# EAGLE board easySens-RS485-RND_455-00307-V003 (EAGLE 8.5.1)

Size 65 x 33 mm. Coordinates in mm from the lower left corner, seen from the top.
Outline: 65,0 0,0 0,33 65,33 65,20.5 65,8.89 65,0
Copper layers (1*16): Top 0.035mm / dielectric 1.5mm / Bottom 0.035mm
Design rules "SeeedStudio_2layer_DRU_no_angle_20140221": minimum track width 6mil, minimum drill 12mil, track to track 6mil, track to pad 6mil, pad to pad 6mil, via to via 6mil, smd to smd 0mil, copper to edge 10mil, drill to drill 10mil, minimum pad ring 10mil, minimum via ring 6mil, stop-mask expansion 2mil, vias tented up to drill 100mil, thermal gap 10mil
Net classes: 0 default: width 0.254 mm; 1 PWR: width 0.406 mm
Holes 2 mm at 52.5,0.5 52.5,32.5 12.5,0.5 12.5,32.5
tRestrict: area 50.3,-1.7 to 54.7,2.7; area 50.3,30.3 to 54.7,34.7; area 10.3,30.3 to 14.7,34.7; area 10.3,-1.7 to 14.7,2.7; area 15.2,-1.3 to 50.8,0.6
bRestrict: area 10.3,-1.7 to 14.7,2.7; area 50.3,-1.7 to 54.7,2.7; area 50.3,30.3 to 54.7,34.7; area 10.3,30.3 to 14.7,34.7; area 15.2,-1.3 to 50.8,0.6

## Footprints (pad centres in the part's own frame; a part is rotated, then mirrored left to right if it is on the bottom)
1X01 = drill 1.016 octagon: 1 0,0
C0805 = smd 1.3 x 1.5: 1 -0.95,0; 2 0.95,0
C1210 = smd 1.6 x 2.7: 1 -1.4,0; 2 1.4,0
1812L = smd 2.03 x 3.3: P$1 -2.16,0; P$2 2.16,0
0603-1608X90N = smd 0.95 x 1: 1 -0.8,0; 2 0.8,0
SOT23 = smd 1.016 x 1.143: 1 -0.889,-1.016; 2 0.889,-1.016; 3 0,1.016
SOT223 = smd 1.499 x 2.007: 1 -2.261,-3.15; 2 0.025,-3.15; 3 2.311,-3.15 | smd 3.81 x 2.007: 4 0,3.15
SSOP28 = smd 0.381 x 2.032: 1 0,0; 2 0.65,0; 3 1.3,0; 4 1.95,0; 5 2.6,0; 6 3.25,0; 7 3.9,0; 8 4.55,0; 9 5.2,0; 10 5.85,0; 11 6.5,0; 12 7.15,0; 13 7.8,0; 14 8.45,0; 15 8.45,7.112; 16 7.8,7.112; 17 7.15,7.112; 18 6.5,7.112; 19 5.85,7.112; 20 5.2,7.112; 21 4.55,7.112; 22 3.9,7.112; 23 3.25,7.112; 24 2.6,7.112; 25 1.95,7.112; 26 1.3,7.112; 27 0.65,7.112; 28 0,7.112
RJ45_2X_NARROW_SHILDPINS = drill 0.889: 1-1 -11.43,6.35; 1-2 -10.16,8.89; 1-3 -8.89,6.35; 1-4 -7.62,8.89; 1-5 -6.35,6.35; 1-6 -5.08,8.89; 1-7 -3.81,6.35; 1-8 -2.54,8.89; 2-1 2.54,6.35; 2-2 3.81,8.89; 2-3 5.08,6.35; 2-4 6.35,8.89; 2-5 7.62,6.35; 2-6 8.89,8.89; 2-7 10.16,6.35; 2-8 11.43,8.89 | drill 1.575 pad 2.184: G1 -15,-3; G2 0,10.414; G3 15,-3 | hole 2.6: -12.7,0; 12.573,0
USB-MINI-B_2 = smd 0.508 x 2.54: 1 0,0; 2 0.8,0; 3 1.6,0; 4 2.4,0; 5 3.2,0 | smd 2.286 x 1.778: 6 -2.717,5.948; 7 -2.717,0.36; 8 5.918,0.36; 9 5.918,5.948 | hole 0.95: -0.6,2.9; 3.8,2.9
SMT-JUMPER_2_NC_PASTE_SILK = smd 0.635 x 1.27: 1 -0.406,0; 2 0.406,0
ARDUINO-PRO-MINI#NP = drill 1: J2.1 -1.27,5.08; J2.2 -3.81,5.08; J3.1 15.24,0; J3.2 15.24,2.54; J3.3 15.24,5.08; J6.1 -12.7,7.62; J6.2 -10.16,7.62; J6.3 -7.62,7.62; J6.4 -5.08,7.62; J6.5 -2.54,7.62; J6.6 0,7.62; J6.7 2.54,7.62; J6.8 5.08,7.62; J6.9 7.62,7.62; J6.10 10.16,7.62; J6.11 12.7,7.62; J6.12 15.24,7.62; J7.1 15.24,-7.62; J7.2 12.7,-7.62; J7.3 10.16,-7.62; J7.4 7.62,-7.62; J7.5 5.08,-7.62; J7.6 2.54,-7.62; J7.7 0,-7.62; J7.8 -2.54,-7.62; J7.9 -5.08,-7.62; J7.10 -7.62,-7.62; J7.11 -10.16,-7.62; J7.12 -12.7,-7.62
1X04 = drill 1.016 pad 1.88: 1 0,0; 2 2.54,0; 3 5.08,0; 4 7.62,0
M0805 = smd 1.3 x 1.6: 1 -0.95,0; 2 0.95,0
R0805 = smd 1.3 x 1.5: 1 -0.95,0; 2 0.95,0
SJ = smd 1.168 x 1.6: 1 -0.762,0; 2 0.762,0
SOIC127P600X175-8N = smd 1.981 x 0.533: 1 -2.464,1.905; 2 -2.464,0.635; 3 -2.464,-0.635; 4 -2.464,-1.905; 5 2.464,-1.905; 6 2.464,-0.635; 7 2.464,0.635; 8 2.464,1.905
CHIPLED_0805 = smd 1.2 x 1.2: A 0,-1.05; C 0,1.05
SMT-JUMPER_3_1-NC_TRACE_SILK = smd 0.635 x 1.27: 1 -1.016,0; 2 0,0; 3 1.016,0
MA10-2 = drill 1.016 octagon: 1 -11.43,-1.27; 2 -11.43,1.27; 3 -8.89,-1.27; 4 -8.89,1.27; 5 -6.35,-1.27; 6 -6.35,1.27; 7 -3.81,-1.27; 8 -3.81,1.27; 9 -1.27,-1.27; 10 -1.27,1.27; 11 1.27,-1.27; 12 1.27,1.27; 13 3.81,-1.27; 14 3.81,1.27; 15 6.35,-1.27; 16 6.35,1.27; 17 8.89,-1.27; 18 8.89,1.27; 19 11.43,-1.27; 20 11.43,1.27
PJ-102A = drill 3 pad 4.8: RING 0.1,-3.39; RING_SW -4.6,-6.29; TIP 0.1,-9.29
SMT-JUMPER_3_NO_SILK = smd 0.635 x 1.27: 1 -0.813,0; 2 0,0; 3 0.813,0
1751264 = drill 1.1 pad 1.7: 1 -5.25,-0.1; 2 -1.75,-0.1; 3 1.75,-0.1; 4 5.25,-0.1

## Placement (x,y rotation side)
A4  [1X01]  24.13,22.86 0 top
C4  100nF  [C0805]  57.15,13.97 270 top
C5  47uF  [C1210]  47.62,7.62 270 bottom
C6  100nF  [C0805]  57.15,22.86 90 bottom
C10  22p  [C0805]  35.56,5.08 180 bottom
F1  1812L  [1812L]  52.07,8.26 270 bottom
F2  MFFSMF050  [0603-1608X90N]  60.96,15.88 0 top
IC1  ATSHA204A  [SOT23]  7.62,24.13 270 bottom
IC3  REG1117  [SOT223]  48.26,8.26 270 top
IC4  FT232RL  [SSOP28]  45.72,16.51 90 bottom
J1  [RJ45_2X_NARROW_SHILDPINS]  4.8,16.5 270 top
J3  [USB-MINI-B_2]  57.9,28.85 270 top
LAN4  JUMPER-SMT_2_NC_PASTE_SILK  [SMT-JUMPER_2_NC_PASTE_SILK]  15.88,28.57 90 bottom
LAN5  JUMPER-SMT_2_NC_PASTE_SILK  [SMT-JUMPER_2_NC_PASTE_SILK]  8.26,28.57 90 bottom
M1  ARDUINO-PRO-MINI-3.3V#NP  [ARDUINO-PRO-MINI#NP]  39.37,20.32 180 top
OPT  [1X04]  36,31.6 180 top
OPT1  [1X04]  36,1.4 180 top
OPT2  [1X04]  40.64,4 0 top
R1  1M  [M0805]  42.55,8.26 90 bottom
R3  470K  [R0805]  35.56,7.62 0 bottom
R5  150R  [R0805]  7.62,13.97 270 bottom
R6  330R  [R0805]  7.62,19.05 270 bottom
R7  330R  [R0805]  7.62,8.89 270 bottom
R8  10K  [R0805]  26.67,5.08 0 top
R9  330  [R0805]  60.33,17.78 90 bottom
R10  330  [R0805]  57.15,17.78 90 bottom
R11  1K  [R0805]  48.26,30.48 0 bottom
R12  1K  [R0805]  41.91,24.13 270 bottom
R13  10K  [R0805]  26.67,8.89 0 top
RAW  [SJ]  57.15,13.34 270 bottom
RS485  MAX487ECSA+  [SOIC127P600X175-8N]  19.05,3.17 180 top
RX  Red  [CHIPLED_0805]  60.96,19.68 90 top
RX_SEL  JUMPER-SMT_3_1-NC_TRACE_SILK  [SMT-JUMPER_3_1-NC_TRACE_SILK]  26.04,5.08 180 bottom
SV1  [MA10-2]  19.9,19.89 270 top
TX  Green  [CHIPLED_0805]  60.96,17.78 90 top
TX_SEL  JUMPER-SMT_3_1-NC_TRACE_SILK  [SMT-JUMPER_3_1-NC_TRACE_SILK]  31.75,5.08 180 bottom
U$3  2.1MMJACKTHM  [PJ-102A]  65.4,4.05 270 top
V_SEL  JUMPER-SMT_3_NO_SILK  [SMT-JUMPER_3_NO_SILK]  60.33,13.34 90 bottom
X1  1751264  [1751264]  3,16.5 90 top

## Library data of the parts
A4 = pinhead
C4 C6 R9-R12 = resistor@1
C5 C10 R1 R3 R5-R8 R13 = rcl
F1 = ptc-littlefuse
F2 = Arduino-rcl; DATASHEET: http://www.bourns.com/docs/Product-Datasheets/mffsmf.pdf; DISTRIBUTOR-LINK: http://www.digikey.com/product-detail/en/bourns-inc/MF-FSMF050X-2/MF-FSMF050X-2CT-ND/2039389; DISTRIBUTOR-PN: MF-FSMF050X-2CT-ND; MANUFACTURER: Bourns Inc; MANUFACTURER-PN: MF-FSMF050X-2
IC1 = Sensor
IC3 = burr-brown; MPN: REG1117; OC_FARNELL: 1097566; OC_NEWARK: 14P6981
IC4 = IntegratedCircuits; CASE: SSOP28; MONTHLY_USAGE: _____; PART_NUMBER: FT232RL; PRICE: _____; SUPPLIER: _____; TYPE: Circuito_Integrato
J1 = RJ45
J3 = Connettori; MONTHLY_USAGE: _____; PART_NUMBER: 14850; PRICE: _____; SUPPLIER: _____; TYPE: Connettori
LAN4 LAN5 RX_SEL TX_SEL V_SEL = SparkFun-Jumpers
M1 = diy-modules
OPT OPT1 OPT2 = SparkFun-Connectors; PROD_ID: CONN-09696
RAW = jumper
RS485 = Maxim_By_element14_Batch_1; MPN: MAX487ECSA+; OC_FARNELL: 9724532; OC_NEWARK: 68K4803; PACKAGE: SOIC-8; SUPPLIER: Maxim
RX = Opto; MONTHLY_USAGE: _____; PART_NUMBER: KTP-2012SURCK; PRICE: _____; SUPPLIER: _____; TYPE: Opto
SV1 = con-lstb; OC_FARNELL: unknown; OC_NEWARK: unknown
TX = Opto; MONTHLY_USAGE: _____; PART_NUMBER: KPT-2012SGC; PRICE: _____; SUPPLIER: _____; TYPE: Opto
U$3 = adafruit
X1 = con-phoenix-350; MPN: 1751264; OC_FARNELL: unknown; OC_NEWARK: 10R0934

## Nets
3V3: C6.2 IC4.17 V_SEL.3
4: J1.1-4 LAN4.1
5: J1.1-5 LAN5.1
A: J1.1-1 J1.2-1 LAN4.2 R5.1 R6.2 RS485.6 X1.2
A0: M1.J6.8 SV1.8
A1: M1.J6.7 OPT1.1
A2: M1.J6.6 OPT1.2
A3: M1.J6.5 R1.2 R3.1 SV1.15
A4: A4.1 M1.J2.1 OPT.4 R8.2 SV1.16
A5: M1.J2.2 M1.J3.1 OPT.3 R13.2
A6: M1.J3.2
A7: M1.J3.3
B: J1.1-2 J1.2-2 LAN5.2 R5.2 R7.1 RS485.7 X1.3
COM: C6.1 IC4.7 IC4.18 IC4.21 IC4.25 IC4.26 J3.1 J3.6 J3.7 J3.8 J3.9
D1-TXD: M1.J7.12 R11.1 SV1.5 TX_SEL.1
D2_INT0: M1.J7.8 RS485.2 RS485.3
D3: M1.J7.7 SV1.9
D4: M1.J7.6 SV1.10
D5: M1.J7.5 SV1.11
D6: M1.J7.4 SV1.12
D7-ATSHA: IC1.1 M1.J7.3 SV1.13
D8: M1.J7.2 RX_SEL.3 SV1.14
D9_IRQ: M1.J7.1 TX_SEL.3
D10_SS: M1.J6.12 SV1.20
D11_MOSI: M1.J6.11 SV1.17
D12_MISO: M1.J6.10 SV1.18
D13_SCK: M1.J6.9 SV1.19
FREI: OPT2.4
GND [PWR]: C5.1 C10.1 IC1.3 IC3.1 J1.1-6 J1.1-8 J1.2-6 J1.2-8 J1.G1 J1.G3 M1.J6.2 M1.J7.9 OPT2.2 OPT.2 R3.2 R7.2 RS485.5 SV1.4 U$3.RING X1.4
N$1: IC4.4 V_SEL.2
N$2: IC4.22 R10.1
N$4: C4.2 IC4.2
N$5: IC4.15 J3.3
N$6: IC4.16 J3.4
N$7: R9.2 RX.C
N$8: IC4.23 R9.1
N$9: R10.2 TX.C
N$26: F2.2 J3.5
RAW1 [PWR]: M1.J6.1 RAW.1
RESET: C4.1 M1.J7.10 SV1.7
RX: RS485.1 RX_SEL.2
RX232: IC4.1 R12.2
RXD: M1.J7.11 R12.1 RX_SEL.1 SV1.6
TX: RS485.4 TX_SEL.2
TX232: IC4.5 R11.2
VCC [PWR]: C5.2 C10.2 IC1.2 IC3.2 IC4.20 M1.J6.4 OPT2.1 OPT.1 R6.1 R8.1 R13.1 RS485.8 RX.A SV1.2 SV1.3 TX.A
VIN [PWR]: F1.P$2 J1.1-3 J1.1-7 J1.2-3 J1.2-7 OPT2.3 RAW.2 SV1.1 U$3.TIP X1.1
VIN-FUSED [PWR]: F1.P$1 IC3.3 R1.1
VUSB: F2.1 V_SEL.1

## Tracks (layer width: path | path; a pad name or v marks a point on that pad's centre or on a via)
3V3  (2 unrouted)
4  (1 unrouted)
5  (1 unrouted)
A  (6 unrouted)
A0  (1 unrouted)
A1  (1 unrouted)
A2  (1 unrouted)
A3  (3 unrouted)
A4  (4 unrouted)
A5  (3 unrouted)
B  (6 unrouted)
COM  (10 unrouted)
D1-TXD  (3 unrouted)
D2_INT0  (2 unrouted)
D3  (1 unrouted)
D4  (1 unrouted)
D5  (1 unrouted)
D6  (1 unrouted)
D7-ATSHA  (2 unrouted)
D8  (2 unrouted)
D9_IRQ  (1 unrouted)
D10_SS  (1 unrouted)
D11_MOSI  (1 unrouted)
D12_MISO  (1 unrouted)
D13_SCK  (1 unrouted)
GND  (19 unrouted)
N$1  (1 unrouted)
N$2  (1 unrouted)
N$4  (1 unrouted)
N$5  (1 unrouted)
N$6  (1 unrouted)
N$7  (1 unrouted)
N$8  (1 unrouted)
N$9  (1 unrouted)
N$26  (1 unrouted)
RAW1  (1 unrouted)
RESET  (2 unrouted)
RX  (1 unrouted)
RX232  (1 unrouted)
RXD  (3 unrouted)
TX  (1 unrouted)
TX232  (1 unrouted)
VCC  (15 unrouted)
VIN  (9 unrouted)
VIN-FUSED  (2 unrouted)
VUSB  (1 unrouted)
(copper drawn outside any net)
  shapes: Top area x1

## Text on the board
tNames: Box: RND 455-00307 | Fuse2 | USB | A4/SDA | A5 | GND | VCC | OPT | R4 | R11 | GND | RX | TX | B | ANT | A | RS485 | VIN | R2 | C4 | MysX | C32 | GND | A7 | A6 | A2 | A1 | miniGW_RJ45 V0.1 | VIN | OPT1
bNames: Voltage Select | LOOP-B | LOOP-A | 5V | 3V3 | C14 | C15 | Crystal | FT232RL | ATSHA | C6 | R9 | R6 | R10 | R5 | RXD | D8 | TXD | D9 | R1 | R12 | REG1117 | R34 | R3 | C31 | R7 | RX_Select | TX_Select | R8 | C10 | EEPROM | C5 | Fuse1 | V-EEPROM | ATMEGA328P
tDocu: 1 Vraw (typically unregulated voltage, either from motherboard to daughterboard or vice versa) Motherboard should have a jumper to cut onboard Vraw source if daughterboard provides Vraw. Be sure to check motherboard constraints on Vraw before connecting a daughterboard that provides Vraw (for over voltage protection). Should be able to source at least 100mA and all boards are recommended to support a voltage up to 24V on this pin. / 2 +3.3V fixed voltage (can source at least 100mA) / 3 VCCio (depending on MCU core voltage). Should not be used for heavy loads. / 4 GND / 5 MYSX_D1_DFM - Digital IO (USART TX (data from MCU)) / 6 MYSX_D2_DTM - Digital IO (USART RX (data to MCU)) / 7 MYSX_RST - Reset (On the board that carries the MCU, it is highly recommended that this pin has a 0.1uF capacitor in series for pulse “generation”) / 8 MYSX_LEGACY_ID – MYSX 1.x identification (2.0 daughterboards can tie this pin to VCC to allow the motherboard to determine if daughterboard is 1.x or 2.x. If identification is not needed or is undesired, pin can be used as regular analog input) / 9 MYSX_D3_INT - Digital IO (interrupt) / 10 MYSX_D4_INT - Digital IO (interrupt) / 11 MYSX_D5_PWM - Digital IO (PWM) / 12 MYSX_D6_PWM - Digital IO (PWM) / 13 MYSX_D7_SCL - Digital IO (I2C SCL) / 14 MYSX_D8_SDA - Digital IO (I2C SDA) / 15 MYSX_D9_A3 - Digital IO (analog input) / 16 MYSX_D10_A4 - Digital IO (analog input) / 17 MYSX_D11_MOSI - Digital IO (SPI MOSI) / 18 MYSX_D12_MISO - Digital IO (SPI MISO) / 19 MYSX_D13_SCK - Digital IO (SPI SCK) / 20 MYSX_D14_CS - Digital IO (also for SPI CS) / 21 MYSX_A5 - Analog input / 22 MYSX_A6 - Analog input
Name: I2C-CON | A2 | A1